# Altium PCB 27进制.PcbDoc
Units mm, origin at the board's own origin, x right, y up, seen from the top; angles counter-clockwise.
Board outline 152.4 x 101.6 mm, 2 copper layers (Top Layer, Bottom Layer); 19 components, 34 nets, 125 pads, 0 vias.
Unrouted connection lines stored in the file: 40.
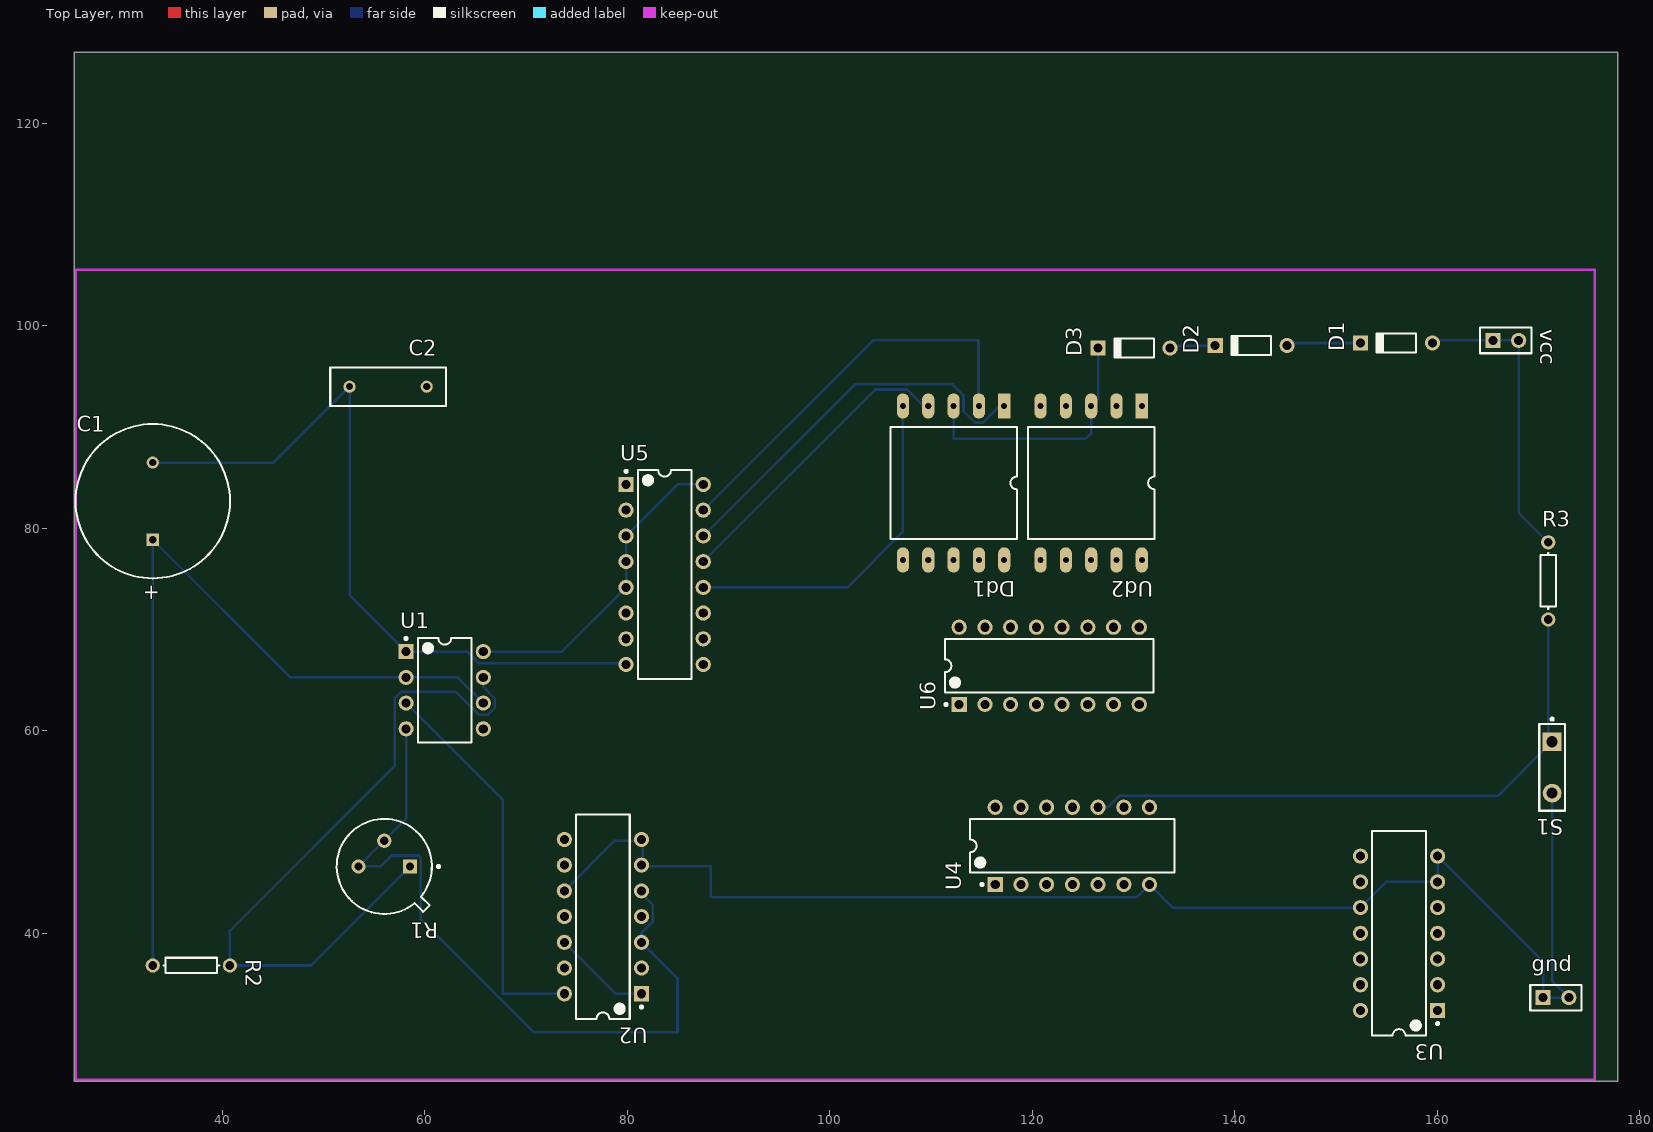
[diagram p0: Top Layer view]
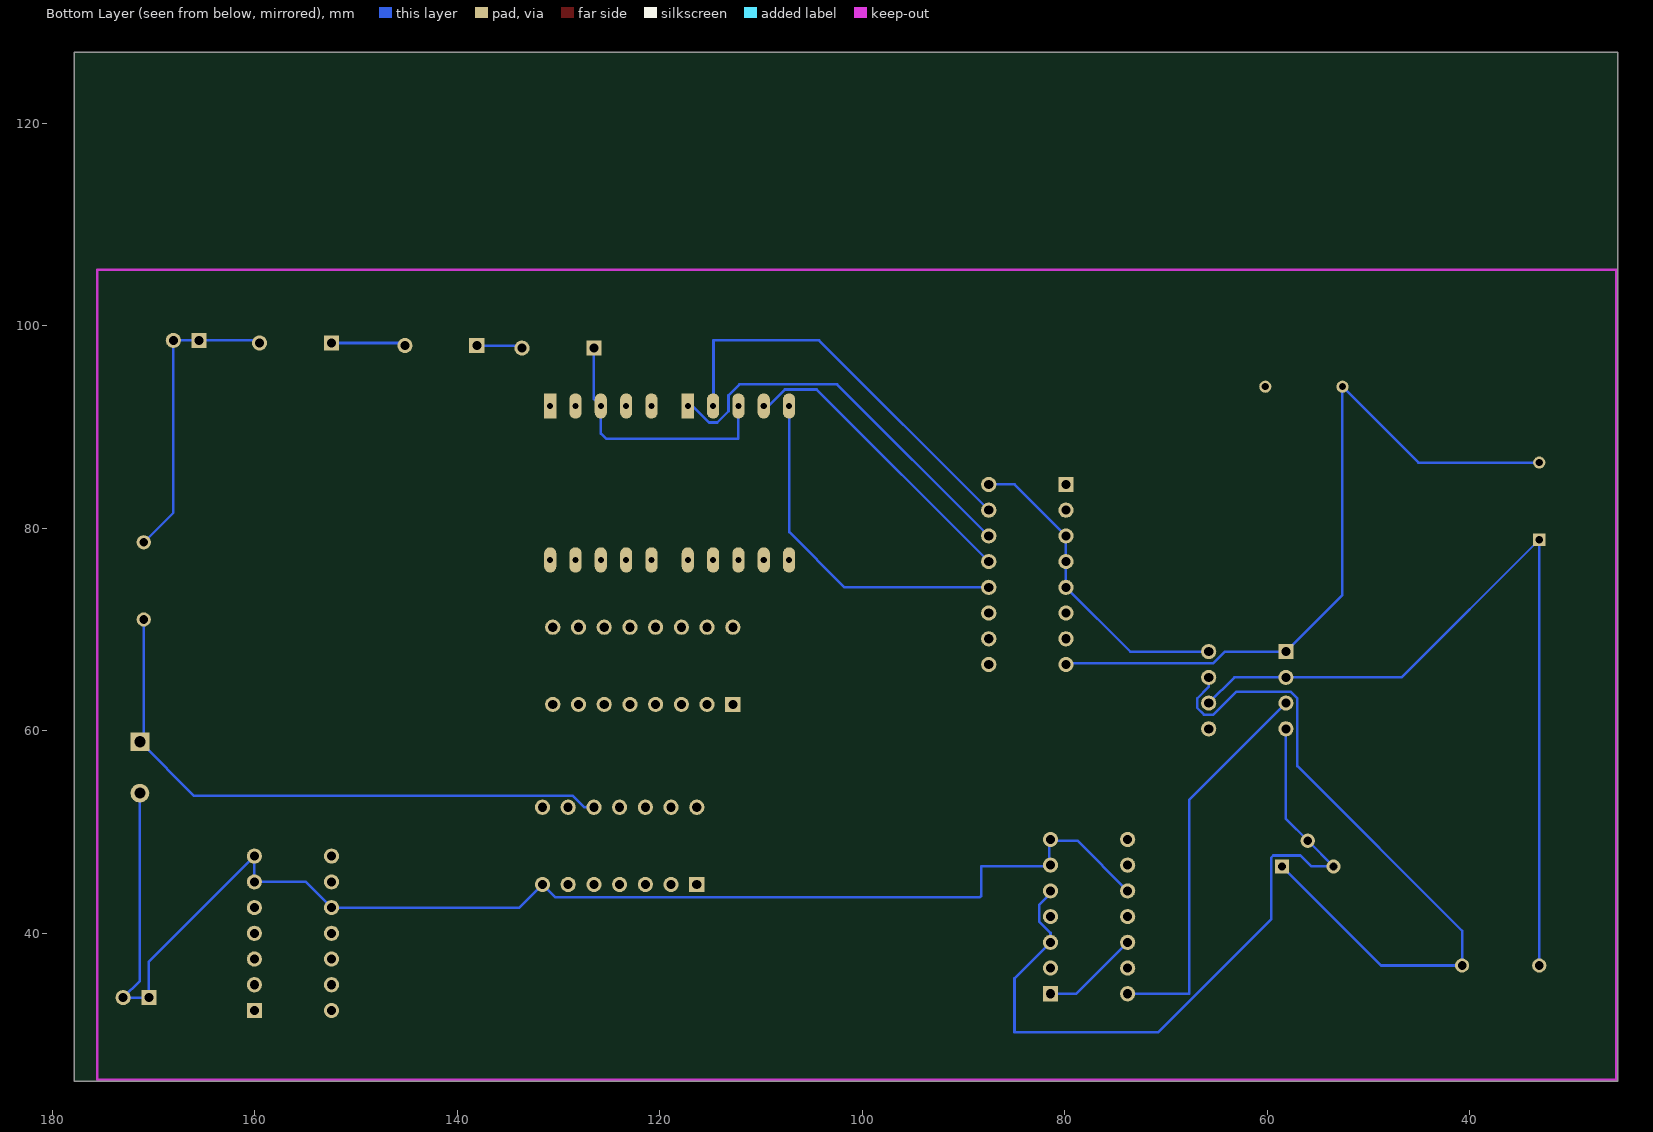
[diagram p1: Bottom Layer view, seen from below]

## Layer stack, top to bottom
Top Layer: signal copper 0.0356
Dielectric: dielectric 0.32, FR-4, Dk 4.8
Bottom Layer: signal copper 0.0356

## Board outline
25.4,25.4 177.8,25.4 177.8,127 25.4,127

## Design rules (kind name [scope] priority, off if disabled: settings)
Clearance [All] p1: gap=0.254
PolygonConnect [All] p1: connectstyle=Relief reliefconductorwidth=0.254 reliefentries=4 polygonreliefangle="90 Angle"
RoutingLayers [All] p1: top layer_v5=FALSE bottom layer_v5=TRUE
RoutingVias [All] p1: holewidth=0.711 width=1.27 viastyle="Through Hole" minholewidth=0.711 minwidth=1.27 maxholewidth=0.711 maxwidth=1.27
SilkscreenOverComponentPads [All] p1: minsilkscreentomaskgap=0.254
SolderMaskExpansion [All] p1: expansion=0.102
Width [All] p1: maxlimit=0.254 minlimit=0.254 preferedwidth=0.254
26 further rules are at their usual default settings.

## Classes and differential pairs
component class 27进制: C1 C2 D1 D2 D3 Dd1 gnd R1 R2 R3 S1 U1 U2 U4 U5 U6 Ud2 vcc

## Components (designator, comment, footprint, x,y, rotation, side; value= is the part's Value field where it differs from the comment)
C1 "Cap Pol1" RB7.6-15 33.147,82.677 r270 top
C2 "Cap" RAD-0.3 56.388,93.98 r0 top
D1 "Diode 1N914" DO-35 155.956,98.298 r180 top
D2 "Diode 1N914" DO-35 141.605,98.044 r180 top
D3 "Diode 1N914" DO-35 130.048,97.79 r180 top
Dd1 "digital" DIP10 117.221,92.075 r270 top
gnd "SIP2" HDR1X2 170.434,33.655 r0 top
R1 "Res Tap" TO-39 56.007,46.609 r180 top
R2 "Res1" AXIAL-0.3 36.957,36.83 r0 top
R3 "Res1" AXIAL-0.3 170.942,74.803 r90 top
S1 "SW-PB" SPST-2 171.323,56.388 r270 top
U1 "555_timer" DIP-8 61.976,64.008 r0 top
U2 "74LS90" DIP-14 77.597,41.656 r180 top
U3 "74LS90" DIP-14 156.21,40.005 r180 top
U4 "74LS20" DIP-14 123.952,48.641 r90 top
U5 "74LS47" DIP-16 83.693,75.438 r0 top
U6 "74LS47" DIP-16 121.666,66.421 r90 top
Ud2 "digital" DIP10 130.81,92.075 r270 top
vcc "SIP2" HDR1X2 165.481,98.552 r0 top

## Footprints (in the part's own frame and the unit in brackets; to place one, negate y for a bottom-side part, rotate by r counter-clockwise, add the part's x,y. Pads: shape width x height; smd on the part's side, far side on the other; paste and mask are expansions set on the pad)
AXIAL-0.3 [mm] "Axial Device, Thru-Hole; 2 Leads; 0.3 in Pin Spacin"
  round 1.4 hole 0.85: 1(-3.81,0) 2(3.81,0)
  silkscreen extent -2.77,-0.76 2.77,0.76
DIP10 [mm]
  rect 2.5x1.2 hole 0.6: 1(0,0)
  oval 2.5x1.2 hole 0.6: 2(0,-2.5) 3(0,-5) 4(0,-7.5) 5(0,-10) 6(15.2,-10) 7(15.2,-7.5) 8(15.2,-5) 9(15.2,-2.5) 10(15.2,0)
  silkscreen extent 2.08,-11.25 13.11,1.25
DIP-8 [mm] "DIP; 8 Leads; Row Spacing 7.62 mm; Pitch 2.54"
  rect 1.5x1.5 hole 0.9: 1(-3.81,3.81)
  round 1.5 hole 0.9: 2(-3.81,1.27) 3(-3.81,-1.27) 4(-3.81,-3.81) 5(3.81,-3.81) 6(3.81,-1.27) 7(3.81,1.27) 8(3.81,3.81)
  silkscreen extent -3.93,-5.15 2.65,5.23, body extent -3.6,-5.15 3.6,5.15, height 5.08
DIP-14 [mm] "DIP; 14 Leads; Row Spacing 7.62 mm; Pitch 2.54"
  rect 1.5x1.5 hole 0.9: 1(-3.81,7.62)
  round 1.5 hole 0.9: 2(-3.81,5.08) 3(-3.81,2.54) 4(-3.81,0) 5(-3.81,-2.54) 6(-3.81,-5.08) 7(-3.81,-7.62) 8(3.81,-7.62) 9(3.81,-5.08) 10(3.81,-2.54) 11(3.81,0) 12(3.81,2.54) 13(3.81,5.08) 14(3.81,7.62)
  silkscreen extent -3.94,-10.1 2.65,10.1, body extent -3.6,-10.1 3.6,10.1, height 5.08
DIP-16 [mm] "DIP; 16 Leads; Row Spacing 7.62 mm; Pitch 2.54"
  rect 1.5x1.5 hole 0.9: 1(-3.81,8.89)
  round 1.5 hole 0.9: 2(-3.81,6.35) 3(-3.81,3.81) 4(-3.81,1.27) 5(-3.81,-1.27) 6(-3.81,-3.81) 7(-3.81,-6.35) 8(-3.81,-8.89) 9(3.81,-8.89) 10(3.81,-6.35) 11(3.81,-3.81) 12(3.81,-1.27) 13(3.81,1.27) 14(3.81,3.81) 15(3.81,6.35) 16(3.81,8.89)
  silkscreen extent -3.93,-10.3 2.65,10.31, body extent -3.6,-10.28 3.6,10.28, height 5.08
DO-35 [mm] "Diode, Axial; Body 3.8 x 1.9 mm (LxDia. max), Lead Dia. 0.53 mm (max"
  round 1.5 hole 0.9: 1(-3.55,0)
  rect 1.5x1.5 hole 0.9: 2(3.55,0)
  silkscreen extent -1.95,-0.95 2.05,0.95
HDR1X2 [mm] "Connector; Header; 2 Posit"
  rect 1.5x1.5 hole 0.9: 1(0,0)
  round 1.5 hole 0.9: 2(2.54,0)
  silkscreen extent -1.27,-1.27 3.81,1.27
RAD-0.3 [mm] "Radial Cap, Thru-Hole; 2 Leads; 0.3 in Pin Spacin"
  round 1.2 hole 0.7: 1(-3.81,0) 2(3.81,0)
  silkscreen extent -5.71,-1.91 5.71,1.91
RB7.6-15 [mm] "Polarized Capacitor (Radial); 2 Lead"
  rect 1.2x1.2 hole 0.7: 1(3.81,0)
  round 1.2 hole 0.7: 2(-3.81,0)
  silkscreen extent -7.62,-7.62 7.62,7.62
SPST-2 [mm] "Switch; 2 Lead"
  rect 1.85x1.85 hole 1.1: 1(-2.54,0)
  round 1.85 hole 1.1: 2(2.54,0)
  silkscreen extent -4.89,-1.27 4.28,1.27
TO-39 [mm] "Can; 3 Leads; Pin Circle Dia. 5.08 mm; Lead Dia. 0.48 mm (max"
  rect 1.4x1.4 hole 0.8: 1(-2.54,0)
  round 1.4 hole 0.8: 2(0,-2.54) 3(2.54,0)
  silkscreen extent -5.48,-4.69 4.69,4.69, body extent -4.7,-4.7 4.7,4.7, height 4.55

## Part data
C1: "Polarized Capacitor (Radial)"
C2: "Capacitor"
D1 D2 D3: "High Conductance Fast Diode"
Dd1 Ud2: library part di
gnd vcc: "jointbar"
R1: "Tapped Resistor"
R2 R3: "Resistor"
S1: "Switch"

## Nets (pads, with @x,y where several pads share a name; then routed paths per layer and width w, separated by ;. In a path a pad name is that pad's centre, name@x,y a point inside that pad or via, vN(x,y) a via of type N, cw(c..) or ccw(c..) an arc to the next point about the centre after c; other vN are vias at no path point)
A1: Dd1.4 U5.13 | length 29.9
  Bottom Layer w0.254: U5.13 104.501,93.706 107.627,93.706 109.258,92.075 Dd1.4
B1: Dd1.5 U5.12 | length 34.4
  Bottom Layer w0.254: U5.12 101.727,74.168 107.188,79.629 Dd1.5@107.188,92.042
C1: Dd1.9 U5.11
D1: Dd1.7 U5.10
E1: Dd1.6 U5.9
F1: Dd1.2 U5.15 | length 40.6
  Bottom Layer w0.254: U5.15 104.267,98.552 114.681,98.552 Dd1.2@114.681,92.115
F2: U6.15 Ud2.2
G1: Dd1.1 U5.14 | length 39.1
  Bottom Layer w0.254: U5.14 102.469,94.214 112.119,94.214 113.202,93.131 113.202,91.557 114.315,90.444 115.127,90.444 116.758,92.075 Dd1.1
GND: C1.2 C2.1 gnd.1 gnd.2 S1.2 U1.1 U2.6 U2.7 U2.10 U3.6 U3.7 U3.10 U4.7 U5.8 U6.8 | length 213.6
  Bottom Layer w0.254: C1.2 45.085,86.487 C2.1 52.578,73.406 U1.1 64.187,67.818 65.318,66.687 U5.8@79.744,66.687 ; U2.10 78.74,49.149 81.534,49.149 81.534,46.609 88.265,46.609 88.265,43.688 88.392,43.561 130.302,43.561 U4.7 133.858,42.545 U3.10 154.94,45.085 U3.6 U3.7 170.434,37.211 gnd.1 gnd.2 171.323,35.306 S1.2
NetC1_1: C1.1 R2.1 U1.2 U1.6 | length 81.4
  Bottom Layer w0.254: R2.1 C1.1 46.736,65.278 U1.2 63.246,65.278 U1.6
NetC2_2: C2.2 U1.5
NetD1_2: D1.2 D2.1 | length 7.4
  Bottom Layer w0.254: D2.1 145.409,98.298 D1.2
NetD2_2: D2.2 D3.1 | length 4.2
  Bottom Layer w0.254: D3.1@133.852,98.044 D2.2
NetR1_1: R1.1 R2.2 U1.7 | length 69.8
  Bottom Layer w0.254: R1.1 48.768,36.83 R2.2 40.767,40.259 57.035,56.527 57.035,63.206 57.698,63.869 63.056,63.869 65.318,61.607 66.254,61.607 66.917,62.27 66.917,63.206 65.786,64.337 U1.7
NetR3_1: R3.1 S1.1 U4.10 | length 59.2
  Bottom Layer w0.254: U4.10 127.433,52.451 128.564,53.582 165.977,53.582 S1.1 ; S1.1@170.942,59.309 R3.1
NetU1_3: U1.3 U2.14 | length 38.7
  Bottom Layer w0.254: U1.3 67.691,53.213 67.691,34.036 U2.14
NetU2_1: U2.1 U2.12 U4.1 U5.7 | length 9.7
  Bottom Layer w0.254: U2.12 78.867,34.036 U2.1
NetU2_2: U2.2 U3.2 U4.8
NetU2_8: U2.8 U4.4 U5.2
NetU2_9: U2.9 U4.2 U5.1
NetU2_11: U2.11 U3.14 U5.6
NetU3_1: U3.1 U3.12 U6.7
NetU3_9: U3.9 U4.5 U6.1
NetU4_6: U4.6 U4.9
NetU6_9: U6.9 Ud2.6
NetU6_10: U6.10 Ud2.7
NetU6_11: U6.11 Ud2.9
NetU6_12: U6.12 Ud2.5
NetU6_13: U6.13 Ud2.4
NetU6_14: U6.14 Ud2.1
Q2: U6.2
Q3: U3.11 U6.6
VCC: D1.1 R1.2 R1.3 R3.2 U1.4 U1.8 U2.3 U2.5 U3.3 U3.5 U4.12 U4.13 U4.14 U5.3 U5.4 U5.5 U5.16 U6.3 U6.4 U6.5 U6.16 vcc.1 vcc.2 | length 135.3
  Bottom Layer w0.254: U1.4 58.166,51.308 R1.2 R1.3 55.648,46.609 56.729,47.69 59.405,47.69 59.628,47.467 59.628,41.381 70.783,30.226 84.963,30.226 84.963,35.56 U2.3 81.407,40.057 82.538,41.188 82.538,42.787 U2.5@81.407,43.918 ; U1.8 73.533,67.818 U5.5 U5.4 U5.3 84.963,84.328 U5.16 ; D1.1@159.76,98.552 vcc.1 vcc.2 168.021,81.534 R3.2
VDD: D3.2 Dd1.3 Ud2.3 | length 25.8
  Bottom Layer w0.254: Dd1.3 112.221,88.82 125.269,88.82 125.81,89.361 Ud2.3 126.498,92.763 D3.2
pads on no net: Dd1.8 Dd1.10 U2.4 U2.13 U3.4 U3.8 U3.13 U4.3 U4.11 Ud2.8 Ud2.10

## Keep-outs
Keep-Out Layer:
  lines w0.254: 175.514,25.537 175.514,105.527 29.327,105.527 25.527,105.527 25.527,25.527 175.527,25.527

## Text inside footprints (layer, text, board x,y; h text height)
C1: Top Overlay "+" at 32.41,74.545 h1.5 r270